# EAGLE board altimeter_v2_final (EAGLE 5.10)
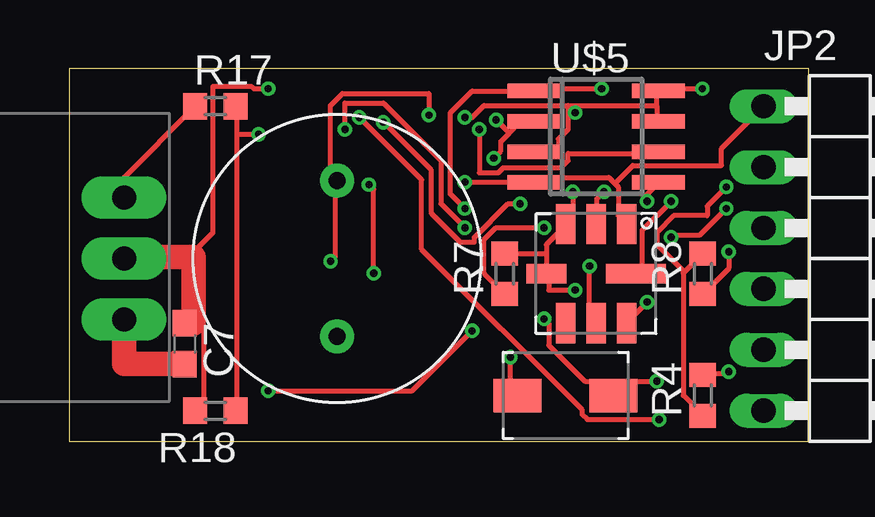
[diagram p0: board, top side]
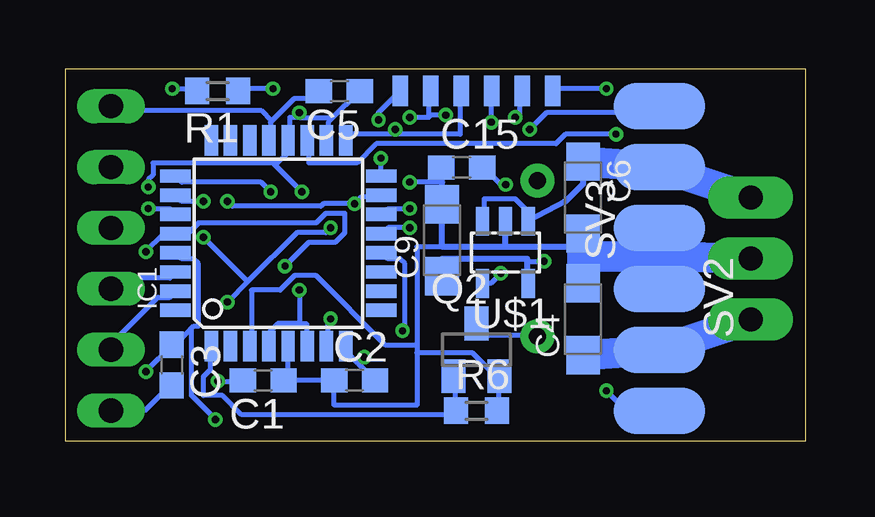
[diagram p1: board, bottom side, seen from below]

Size 30.84 x 15.54 mm. Coordinates in mm from the lower left corner, seen from the top.
Outline: 0,0 30.84,0 30.84,15.54 0,15.54 0,0
Copper layers (1*16): Top 0.035mm / dielectric 1.5mm / Bottom 0.035mm
Design rules "PCB-POOL Standard *": minimum track width 0.2mm, minimum drill 0.3mm, track to track 0.15mm, track to pad 0.15mm, pad to pad 0.15mm, via to via 0.15mm, smd to smd 0.15mm, copper to edge 0.3mm, drill to drill 0.2mm, minimum pad ring 0.2mm, minimum via ring 0.15mm, stop-mask expansion 0.075mm, vias tented up to drill 0.3mm, thermal gap 0.2mm

## Footprints (pad centres in the part's own frame; a part is rotated, then mirrored left to right if it is on the bottom)
C0603 = smd 1.1 x 1: 1 -0.85,0; 2 0.85,0
SMC_A = smd 1.6 x 1.4: + -1.5,0; - 1.5,0
TQFP32-08 = smd 1.27 x 0.559: 1 -4.293,2.8; 2 -4.293,2; 3 -4.293,1.2; 4 -4.293,0.4; 5 -4.293,-0.4; 6 -4.293,-1.2; 7 -4.293,-2; 8 -4.293,-2.8; 17 4.293,-2.8; 18 4.293,-2; 19 4.293,-1.2; 20 4.293,-0.4; 21 4.293,0.4; 22 4.293,1.2; 23 4.293,2; 24 4.293,2.8 | smd 0.559 x 1.27: 9 -2.8,-4.293; 10 -2,-4.293; 11 -1.2,-4.293; 12 -0.4,-4.293; 13 0.4,-4.293; 14 1.2,-4.293; 15 2,-4.293; 16 2.8,-4.293; 25 2.8,4.293; 26 2,4.293; 27 1.2,4.293; 28 0.4,4.293; 29 -0.4,4.293; 30 -1.2,4.293; 31 -2,4.293; 32 -2.8,4.293
ISP_SMALL = smd 0.635 x 1.27: 1 -3.175,0; 2 -1.905,0; 3 -0.635,0; 4 0.635,0; 5 1.905,0; 6 3.175,0
1X06/90 = drill 1.016 long: 1 -6.35,-3.81; 2 -3.81,-3.81; 3 -1.27,-3.81; 4 1.27,-3.81; 5 3.81,-3.81; 6 6.35,-3.81
NX_XTAL = smd 2 x 1.4: P$1 -2,0; P$2 2,0
SOT23 = smd 1 x 1.4: 1 -0.95,-1.1; 2 0.95,-1.1; 3 0,1.1
R0603 = smd 1 x 1.1: 1 -0.85,0; 2 0.85,0
1X03 = smd 1.93 x 3.81: 1 -2.54,0; 2 0,0; 3 2.54,0
SOT23-5L = smd 0.55 x 1.2: 1 -0.95,-1.3; 2 0,-1.3; 3 0.95,-1.3; 4 0.95,1.3; 5 -0.95,1.3
CUI_BUZZER = drill 0.7 pad 1.422 round: P$1 -3.25,0; P$2 3.25,0
SOIC8 = smd 0.6 x 2.2: 1 -1.905,-2.6; 2 -0.635,-2.6; 3 0.635,-2.6; 4 1.905,-2.6; 5 1.905,2.6; 6 0.635,2.6; 7 -0.635,2.6; 8 -1.905,2.6
RECOM_78XX_RA = drill 1 pad 1.778 long: 1 -2.54,0; 2 0,0; 3 2.54,0
BMP085 = smd 1.67 x 0.8: 1 -2.065,1.27; 2 -2.065,0; 3 -2.065,-1.27; 5 2.065,-1.27; 6 2.065,0; 7 2.065,1.27 | smd 0.8 x 1.67: 4 0,-2.065 | smd 0.8 x 2.5: 8 0,1.65

## Placement (x,y rotation side)
C1  33p  [C0603]  22.61,2.54 180 bottom
C2  33p  [C0603]  18.8,2.54 0 bottom
C3  100n  [C0603]  26.42,3.17 270 bottom
C4  22u  [SMC_A]  9.27,5.08 90 bottom
C5  33p  [C0603]  19.43,14.61 180 bottom
C6  22u  [SMC_A]  9.27,10.16 270 bottom
C7  100n  [C0603]  4.83,4.06 270 top
C9  10u  [SMC_A]  15.15,8.37 90 bottom
C15  100n  [C0603]  14.33,11.42 0 bottom
IC1  MEGA8-AI  [TQFP32-08]  21.97,8.26 90 bottom
JP1  ISP  [ISP_SMALL]  13.72,14.61 0 bottom
JP2  SERIAL  [1X06/90]  32.77,7.62 270 top
Q1  [NX_XTAL]  20.7,1.91 0 top
Q2  BSS123  [SOT23]  13.72,3.81 0 bottom
R1  10k  [R0603]  24.51,14.61 180 bottom
R4  1M  [R0603]  26.42,1.91 90 top
R6  1k  [R0603]  13.72,1.27 0 bottom
R7  4k7  [R0603]  18.16,6.99 90 top
R8  4k7  [R0603]  26.42,6.99 90 top
R17  4k7  [R0603]  6.1,13.97 0 top
R18  1k  [R0603]  6.1,1.27 180 top
SV2  OUTPUT  [1X03]  6.1,3.81 270 bottom
SV3  INPUT  [1X03]  6.1,11.43 90 bottom
U$1  LP2985  [SOT23-5L]  12.51,7.87 180 bottom
U$4  CUI_BUZZER  [CUI_BUZZER]  11.18,7.62 270 top
U$5  AT25DF321  [SOIC8]  21.97,12.7 270 top
U$6  RECOM_78XXRA  [RECOM_78XX_RA]  2.29,7.62 270 top
U$10  BMP085  [BMP085]  21.97,6.99 270 top

## Library data of the parts
C1-C7 C9 C15 R1 R4 R6-R8 R17 R18 = resistor
IC1 = atmel
JP1 Q1 SV2 SV3 U$1 U$4-U$6 = logger_custom
JP2 = pinhead
Q2 = transistor-small-signal
U$10 = SparkFun

## Nets
+3V3: C5.1 C9.+ IC1.4 IC1.6 IC1.18 IC1.20 JP1.2 R1.2 R4.1 R7.2 R8.2 U$1.5 U$4.P$1 U$5.3 U$5.7 U$5.8 U$10.3 U$10.4
+5V: C4.+ C7.2 SV2.2 U$6.3
BAT: IC1.19 R17.2 R18.1
BUZ: IC1.1 Q2.1 R6.1
EOC: IC1.25 U$10.2
GND: C1.1 C2.1 C4.- C5.2 C6.- C7.1 C9.- C15.1 IC1.3 IC1.5 IC1.21 JP1.6 JP2.1 Q2.2 R6.2 R18.2 SV2.1 SV3.1 U$1.2 U$5.4 U$6.2 U$10.1
ICP: IC1.12 SV2.3
MISO: IC1.16 JP1.1 U$5.2
MOSI: IC1.15 JP1.4 U$5.5
N$1: C3.2 JP2.6
N$2: C1.2 IC1.7 Q1.P$2
N$3: C2.2 IC1.8 Q1.P$1
N$6: C15.2 U$1.4
N$10: Q2.3 U$4.P$2
RESET': C3.1 IC1.29 JP1.5 R4.2
RXD: IC1.30 JP2.4
SCL: IC1.28 R8.1 U$10.6
SCLK: IC1.17 JP1.3 U$5.6
SDA: IC1.27 R7.1 U$10.7
SERVO: IC1.13 SV3.3
SS: IC1.14 R1.1 U$5.1
TXD: IC1.31 JP2.5
V+: C6.+ R17.1 SV3.2 U$1.1 U$1.3 U$6.1
XCLR: IC1.26 U$10.8

## Tracks (layer width: path | path; a pad name or v marks a point on that pad's centre or on a via)
+3V3  (via drill 0.3)
  Top 0.2: 19.9,7.8 18.2,7.8 R7.2 | 19.9,7.8 U$10.4 20,6.9 20,6.3 v21.1,6.3 | 19.9,7.8 19.9,8.2 20.7,9 U$10.3 20.8,9.1 21,9.3 v21,10.4 | 25.65,7.05 26.4,7.8 R8.2 | 25.65,7.05 25.6,7 25.6,1.9 26.4,1.1 R4.1 | v10.9,7.5 11.1,7.7 11.1,10.8 U$4.P$1 11.1,10.9 10.9,11.1 10.9,14 11.4,14.5 15,14.5 v15,13.6 | v26.4,14.7 24.6,14.7 U$5.8 24.5,14.6 24.5,14 | v16.5,13.5 16.8,13.5 17.3,14 20.8,14 | 20.8,14 24.5,14 | 20.8,14 20.8,13.7 | 20.8,13.7 20.8,13 20.4,12.6 20.4,12.1 19.4,12.1 U$5.3 | 24.5,14 24.5,13.4 U$5.7 | 20.8,13.7 v21.1,13.7 | v27.4,10.6 26.6,9.8 26.6,9.4 25.2,9.4 24.5,8.7 24.5,8.2 25.65,7.05
  Bottom 0.2: 21.1,4.9 22,4.9 22.3,4.6 22.3,4 IC1.4 | 21.1,4.9 20.8,4.9 20.8,4 IC1.6 | v21.1,6.3 21.1,4.9 | 11.6,7.5 v10.9,7.5 | 19.75,13.45 19.9,13.3 19.9,12.6 IC1.18 | 19.75,13.45 18.6,14.6 C5.1 | 21.1,13.5 19.8,13.5 19.75,13.45 | 21.1,13.5 21.5,13.5 21.5,12.6 IC1.20 21.6,12.5 21.6,12 22,11.6 22.2,11.6 | v26.4,14.7 25.4,14.7 R1.2 | 15.7,13.6 15.7,13.5 v16.5,13.5 | 15.7,13.6 15.7,14.6 JP1.2 | v21.1,13.7 21.1,13.5 | v15,13.6 15.7,13.6 | v27.4,10.6 27.4,10.9 27.2,11.1 27.2,11.6 22.2,11.6 | 22.2,11.6 v21,10.4
  Bottom 0.25: C9.+ 15.15,7.6 11.6,7.6 11.6,7.5 11.6,6.57 U$1.5
+5V
  Top 1.016: C7.2 2.29,3.21 U$6.3
  Bottom 1.27: U$6.3 SV2.2 C4.+
BAT  (via drill 0.3)
  Top 0.2: 7,12.8 7,13.9 R17.2 | 7,12.8 7,1.3 R18.1 | 7,12.8 v7.9,12.8
  Bottom 0.2: v7.9,12.8 10,12.8 10.4,12.4 17.9,12.4 18.7,11.6 20.7,11.6 20.7,12.5 IC1.19
BUZ
  Bottom 0.2: Q2.1 14.6,2.7 14.6,1.3 R6.1 14.7,1.3 14.9,1.1 23.5,1.1 24.3,1.9 25.1,1.9 25.1,2.7 24.8,3 24.8,3.9 IC1.1
EOC  (via drill 0.3)
  Top 0.2: v22.3,10.4 22,10.1 22,9.1 U$10.2
  Bottom 0.2: v22.3,10.4 22.7,10.8 26,10.8 26.2,11 IC1.25
GND  (via drill 0.3)
  Top 0.2: 22.75,10.75 22.5,11 19.4,11 19.4,10.8 U$5.4 19.3,10.8 v16.5,10.8 | 22.75,10.75 22.9,10.6 22.9,9.4 23.2,9.1 U$10.1 | 22.75,10.75 23.5,11.5 27.2,11.5 27.2,12.2 28.9,13.9 JP2.1 | R18.2 5.3,1.3 5.6,1.6 5.6,4.7 5.19,4.91 | v8.3,14.7 7.7,14.7 7.6,14.8 6,14.8 6,8.7 5.4,8.1 5.19,7.68
  Top 1.016: C7.1 5.19,4.91 5.19,7.68 2.29,7.68 U$6.2
  Bottom 0.2: IC1.5 21.57,2.54 C1.1 C2.1 19.65,1.5 16.2,1.5 16.2,3.7 | 16.2,4 16.2,8.1 15.15,8.1 | 16.2,4 16.2,3.7 | 22.25,13.35 22.3,13.3 22.3,12.6 IC1.21 | 22.25,13.35 21.3,14.3 20.6,14.3 20.3,14.6 C5.2 | 22.25,13.35 22.7,13.8 28.8,13.8 28.9,13.9 JP2.1 | R6.2 12.8,1.3 12.8,2.7 Q2.2 12.9,2.7 13.9,3.7 16.2,3.7 | 16.2,4 17.5,4 20.4,6.9 21.3,6.9 21.9,6.3 23.1,6.3 23.1,4 IC1.3 | v8.3,14.7 10.5,14.7 JP1.6 | 15.15,10.8 v16.5,10.8
  Bottom 0.25: 12.51,8.1 U$1.2 | 12.51,8.1 9.3,8.1 9.3,8.66 C6.- | 12.51,8.1 15.15,8.1 C9.- 15.15,10.8 15.15,11.42 C15.1
  Bottom 1.27: U$6.2 6.1,7.7 | 6.1,7.7 6.1,7.8 | 6.1,7.8 SV3.1 | 6.1,7.8 SV2.1 | 9.3,8.1 C4.- | C6.- 9.27,7.7 6.1,7.7
ICP  (via drill 0.3)
  Top 0.2: v16.8,4.6 14.3,2.1 v8.3,2.1
  Bottom 0.2: v16.8,4.6 16.7,4.6 16.7,7.4 16.9,7.6 17.4,7.6 17.6,7.8 IC1.12 | v8.3,2.1 7.5,1.3 6.1,1.3 SV2.3
MISO  (via drill 0.3)
  Top 0.2: v17.7,11.8 18,12.1 18,12.5 18.35,12.85 | 18.35,12.85 18.8,13.3 19.3,13.3 U$5.2 | 18.35,12.85 v17.8,13.4
  Bottom 0.2: v17.7,11.8 17.7,11.1 IC1.16 | v17.8,13.4 17.8,13.7 JP1.1
MOSI  (via drill 0.3)
  Top 0.2: v13.1,13.3 15.1,11.3 15.1,9.5 16.3,8.3 16.9,8.3 16.9,8.5 18.3,9.9 v18.8,9.9 | v24.1,10 24.1,10.3 24.5,10.7 U$5.5
  Bottom 0.2: v13.1,13.3 13.1,14.6 JP1.4 | IC1.15 17.7,10.2 18.5,10.2 v18.8,9.9 20.1,9.9 20.2,9.8 23.9,9.8 v24.1,10
N$1
  Bottom 0.2: C3.2 26.5,2.3 27.5,1.3 28.9,1.3 JP2.6
N$2  (via drill 0.3)
  Top 0.2: 22.8,2.5 v24.5,2.5 | 22.8,2.5 22.8,2 Q1.P$2 22.8,2.5 | v19.8,5.1 20,4.9 20,4 21.5,2.5 22.8,2.5
  Bottom 0.2: v24.5,2.5 23.5,2.5 C1.2 | v19.8,5.1 19.9,5.1 19.9,4 IC1.7
N$3  (via drill 0.3)
  Top 0.2: v18.4,3.5 18.4,2.3 18.7,2 Q1.P$1
  Bottom 0.2: 18.65,3.25 19.1,3.7 19.1,3.9 IC1.8 | 18.65,3.25 18,2.6 C2.2 | v18.4,3.5 18.65,3.25
N$6  (via drill 0.3)
  Top 0.2: v12.5,10.7 12.7,10.5 v12.7,7
  Bottom 0.2: v12.5,10.7 12.7,10.7 13.4,11.4 C15.2 | v12.7,7 13.1,6.6 13.4,6.6 U$1.4
N$10
  Bottom 0.2: Q2.3 13.7,4.9 13.2,4.4 11.2,4.4 U$4.P$2
RESET'  (via drill 0.3)
  Top 0.2: v27.5,2.9 27.5,2.8 26.5,2.8 R4.2 | v12.1,13.5 14.7,10.9 14.7,8 21.4,1.3 21.4,1.1 21.6,0.9 v24.6,0.9
  Bottom 0.2: v27.5,2.9 26.4,4 C3.1 26.3,4 25.65,4.65 | 25.65,4.65 25.5,4.8 25.3,4.8 25.3,7.4 25.5,7.6 26,7.6 26.2,7.8 IC1.29 | v12.1,13.5 11.9,13.5 11.9,14.6 JP1.5 | v24.6,0.9 25.6,1.9 25.6,4.6 25.65,4.65
RXD
  Bottom 0.2: IC1.30 26.3,7 26.5,6.8 28.5,6.8 28.9,6.4 JP2.4
SCL  (via drill 0.3)
  Top 0.2: v27.5,7.9 27.5,7.2 26.5,6.2 R8.1 | v21.7,7.3 21.7,5.2 21.9,5 U$10.6
  Bottom 0.2: v27.5,7.9 26.8,8.6 26.3,8.6 IC1.28 26.2,8.7 25.7,8.7 25.3,9.1 20.4,9.1 20,9.5 19.2,9.5 19.2,8.7 19.6,8.3 20.7,8.3 v21.7,7.3
SCLK  (via drill 0.3)
  Top 0.2: v17.1,13 17.1,11.2 17.9,11.2 18.1,11.4 20.5,11.4 20.8,11.7 20.8,12 24.5,12 U$5.6
  Bottom 0.2: 17.1,12.8 18.9,12.8 19.1,12.6 IC1.17 | 17.1,12.8 14.4,12.8 14.4,14.6 JP1.3 | 17.1,12.8 v17.1,13
SDA  (via drill 0.3)
  Top 0.2: v19.8,8.9 17.8,8.9 17.3,8.4 17.3,7 18.1,6.2 R7.1 | v24.1,5.8 23.3,5 U$10.7 | v27.4,9.7 26.3,8.6 25.1,8.6 v25.1,8.5
  Bottom 0.2: v19.8,8.9 20,8.7 21.2,8.7 23.25,6.65 | 23.25,6.65 v24.1,5.8 | v27.4,9.7 26.5,9.7 26.3,9.5 IC1.27 | 23.25,6.65 v25.1,8.5
SERVO  (via drill 0.3)
  Top 0.2: v16.5,8.9 15.5,9.9 15.5,11.7 13.1,14.1 11.5,14.1 v11.5,13
  Bottom 0.2: v16.5,8.9 17.4,8.9 17.6,8.7 IC1.13 | v11.5,13 10.8,13.7 6.3,13.7 6.1,13.9 SV3.3
SS  (via drill 0.3)
  Top 0.2: v22.2,14.7 19.4,14.7 U$5.1 19.3,14.6 16.8,14.6 15.9,13.7 15.9,10.3 v16.5,9.7
  Bottom 0.2: v22.2,14.7 23.6,14.7 R1.1 | v16.5,9.7 17.4,9.7 17.6,9.5 IC1.14
TXD
  Bottom 0.2: IC1.31 26.3,6.2 26.5,6 27,6 28.9,4.1 28.9,3.9 JP2.5
V+
  Top 0.2: R17.1 5.2,13.9 2.3,11 2.3,10.2 U$6.1
  Bottom 0.2: U$1.3 13.4,9.2 13.4,10.1 12.1,10.1 11.4,9.4 U$1.1
  Bottom 0.25: C6.+ 9.27,10.73 10,10 10.04,10 U$1.1
  Bottom 1.27: U$6.1 SV3.2 C6.+
XCLR  (via drill 0.3)
  Top 0.2: v25.1,10 23.9,8.8 23.9,7.2 23.7,7 U$10.8
  Bottom 0.2: v25.1,10 26,10 26.2,10.2 IC1.26